# Altium PCB PCB1.PcbDoc (part 2 of 7)
Units mm, origin at the board's own origin, x right, y up, seen from the top; angles counter-clockwise.
Board outline 100 x 100 mm, 6 copper layers (Top, GND_1, Signal, PWR, GND_2, Bottom), stack 0.816 mm thick; 321 components, 260 nets, 1718 pads, 694 vias.
Unrouted connection lines stored in the file: 527.
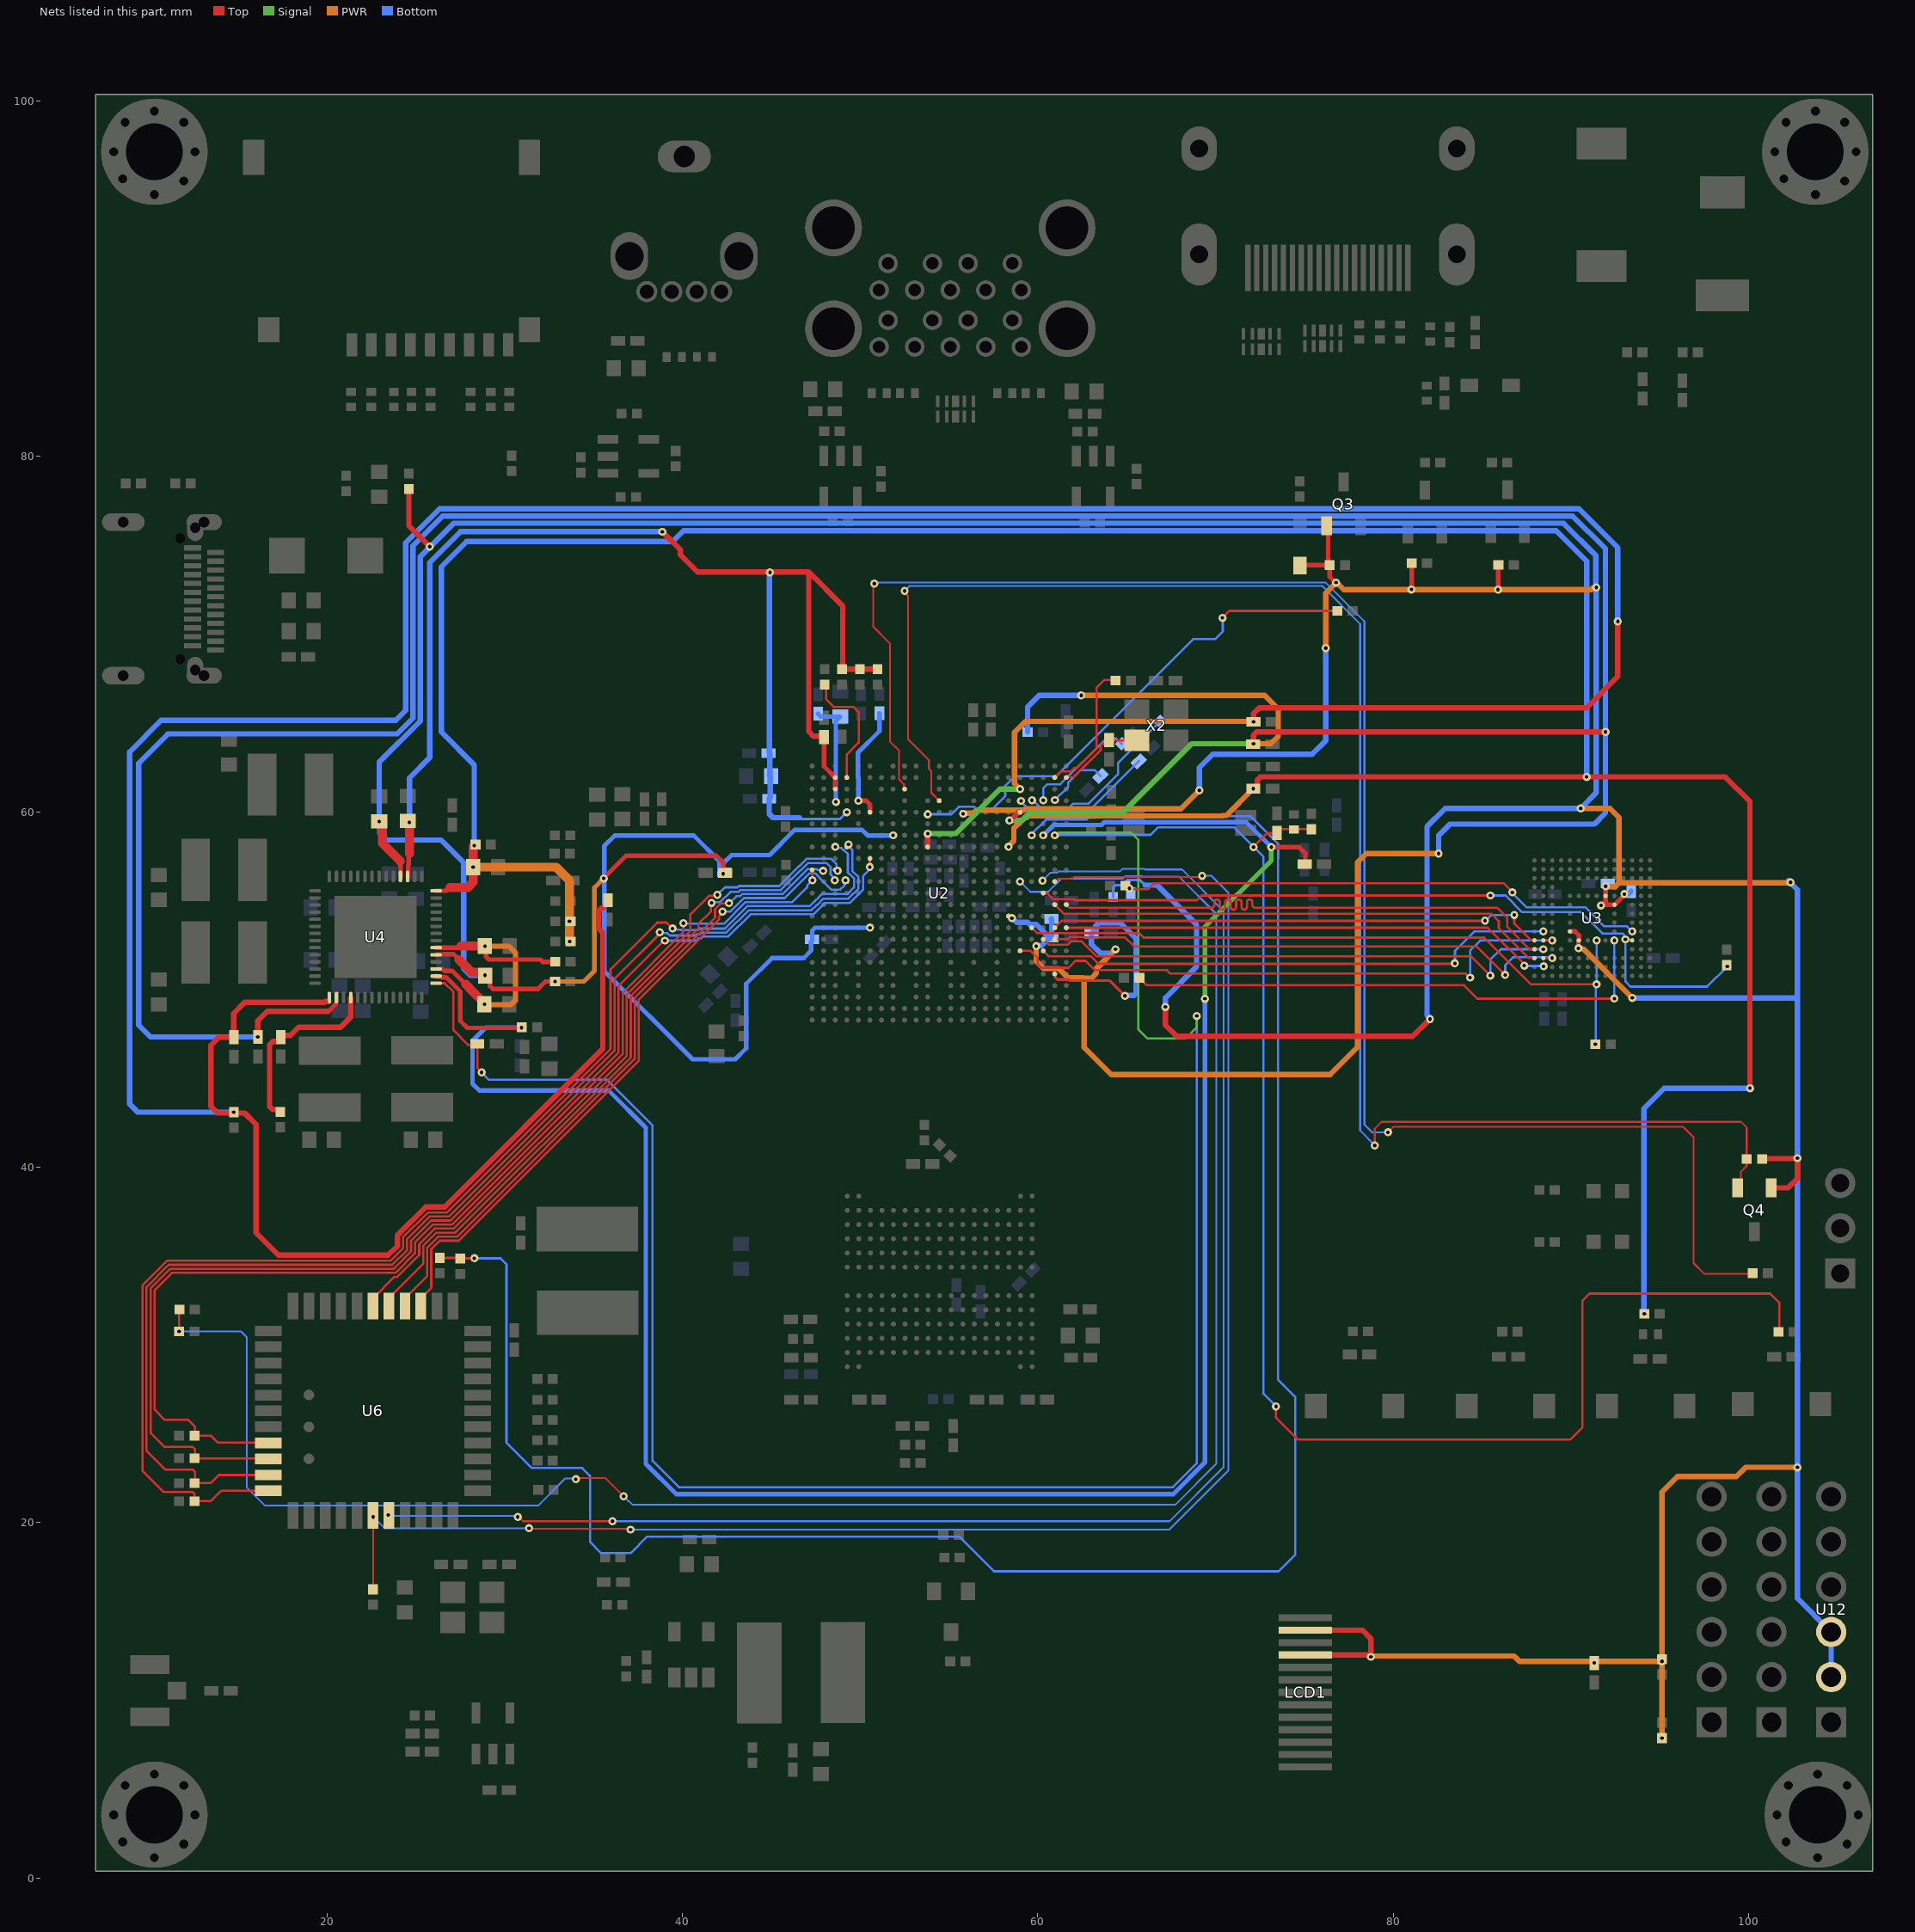
[diagram p6: the nets of this part, all layers, seen from the top]

## Footprints (in the part's own frame and the unit in brackets; to place one, negate y for a bottom-side part, rotate by r counter-clockwise, add the part's x,y. Pads: shape width x height; smd on the part's side, far side on the other; paste and mask are expansions set on the pad) (continued)
TF-SMD_TF-01A [mm]
  rect 0.6x1.3 smd: 1(2.24,5.276) 2(1.14,5.276) 3(0.04,5.276) 4(-1.06,5.276) 5(-2.16,5.276) 6(-3.26,5.276) 7(-4.36,5.276) 8(-5.46,5.276) 9(-6.56,5.276)
  rect 1.2x1.4 smd: 10(-7.76,4.426) 13(6.92,4.426)
  rect 1.2x2 smd: 11(-7.76,-5.276) 12(7.76,-5.276)
  Keep-Out Layer board cut-out: -4.45,-5.566 -4.45,-5.666 -4.526,-5.849 -4.667,-5.99 -4.85,-6.066 -5.049,-6.066 -5.233,-5.99 -5.374,-5.849 -5.45,-5.666 -5.45,-5.566 -5.45,-5.467 -5.374,-5.283 -5.233,-5.142 -5.049,-5.066 -4.85,-5.066 -4.667,-5.142 -4.526,-5.283 -4.45,-5.467 -4.45,-5.566 -4.45,-5.566
  Keep-Out Layer board cut-out: 3.55,-5.566 3.55,-5.666 3.474,-5.849 3.333,-5.99 3.149,-6.066 2.951,-6.066 2.767,-5.99 2.626,-5.849 2.55,-5.666 2.55,-5.566 2.55,-5.467 2.626,-5.283 2.767,-5.142 2.951,-5.066 3.149,-5.066 3.333,-5.142 3.474,-5.283 3.55,-5.467 3.55,-5.566 3.55,-5.566
  Keep-Out Layer circle w0.025: c-4.95,-5.566 r0.5
  Keep-Out Layer circle w0.025: c3.05,-5.566 r0.5
  Keep-Out Layer region: -4.45,-5.566 -4.45,-5.666 -4.526,-5.849 -4.667,-5.99 -4.85,-6.066 -5.049,-6.066 -5.233,-5.99 -5.374,-5.849 -5.45,-5.666 -5.45,-5.566 -5.45,-5.467 -5.374,-5.283 -5.233,-5.142 -5.049,-5.066 -4.85,-5.066 -4.667,-5.142 -4.526,-5.283 -4.45,-5.467 -4.45,-5.566 -4.45,-5.566
  Keep-Out Layer region: 3.55,-5.566 3.55,-5.666 3.474,-5.849 3.333,-5.99 3.149,-6.066 2.951,-6.066 2.767,-5.99 2.626,-5.849 2.55,-5.666 2.55,-5.566 2.55,-5.467 2.626,-5.283 2.767,-5.142 2.951,-5.066 3.149,-5.066 3.333,-5.142 3.474,-5.283 3.55,-5.467 3.55,-5.566 3.55,-5.566
  silkscreen extent -7.37,-9.58 7.37,3.41, body extent -8,-9.78 7.97,5.71, height 1.92
TSOT-23-5_L2.9-W1.6-P0.95-LS2.8-BR [mm]
  rect 1.1x0.7 smd: 1(1.294,-0.951) 2(1.294,-0.001) 3(1.294,0.951) 4(-1.294,0.951) 5(-1.294,-0.949)
  silkscreen extent -0.97,-1.65 1.52,1.61, body extent -1.2,-1.45 1.2,1.45, height 1
USB-A-TH_4P-P1.40-V-F-C39416 [mm]
  round 1.2 hole 0.8: 1(2.098,3.8) 2(0.698,3.8) 3(-0.699,3.8) 4(-2.098,3.8)
  oval 2.1x2.7 hole 1.6 slot 2.1 at 90 deg copper offset -0.001,0.001: 5(-3.08,1.8)
  oval 2.1x2.7 hole 1.6 slot 2.3 at 90 deg copper offset 0.001,0.001: 6(3.08,1.8)
  oval 3x1.8 hole 1.2 slot 2.4 at 0 deg: 7(-0.01,-3.8)
  silkscreen extent -3.5,-8.7 3.5,4.9, body extent -3.4,-8.78 3.6,5.02, height 14.69
USB-A-TH_XUNPU_USB-303WSD-BRY [mm]
  round 1.1 hole 0.7 paste-2539.97 mask+0.05: 1(-3.5,-1.35) 2(-1,-1.35) 3(1,-1.35) 4(3.5,-1.35) 5(4,0.15) 6(2,0.15) 7(0,0.15) 8(-2,0.15) 9(-4,0.15) 10(-3.5,1.85) 11(-1,1.85) 12(1,1.85) 13(3.5,1.85) 14(4,3.35) 15(2,3.35) 16(0,3.35) 17(-2,3.35) 18(-4,3.35)
  round 3.2 hole 2.4 paste-2539.97 mask+0.05: 19(6.57,-3.35) 20(6.57,2.33) 21(-6.57,2.33) 22(-6.57,-3.35)
  silkscreen extent -7.26,-12.97 7.19,4.7, body extent -7.9,-12.93 7.7,4.57, height 15.96
USB-C-SMD_MC-312D-C [mm]
  oval 0.9x2 hole 0.6 slot 1.6 at 90 deg paste-2539.97 mask+0.051: 1(-4.32,1.95) 2(4.32,1.95)
  oval 1.5x0.9 hole 0.6 slot 1.2 at 0 deg paste-2539.97 mask+0.051: 1(-4,1.45) 2(4,1.45)
  oval 1x2.4 hole 0.6 slot 1.9 at 90 deg paste-2539.97 mask+0.051: 3(4.32,-2.6) 4(-4.32,-2.6)
  rect 0.3x0.95 smd paste-100 mask+0.051: A1(-2.62,2.6) A2(-2.12,2.6) A3(-1.62,2.6) A4(-1.12,2.6) A5(-0.62,2.6) A6(-0.12,2.6) A7(0.38,2.6) A8(0.88,2.6) A9(1.38,2.6) A10(1.88,2.6) A11(2.38,2.6) A12(2.88,2.6) B1(2.63,1.3) B2(2.13,1.3) B3(1.63,1.3) B4(1.13,1.3) B5(0.63,1.3) B6(0.13,1.3) B7(-0.37,1.3) B8(-0.87,1.3) B9(-1.37,1.3) B10(-1.87,1.3) B11(-2.37,1.3) B12(-2.87,1.3)
  round 0.6 hole 0.6 unplated paste-2539.97: ""(-3.4,0.6) ""(3.4,0.6)
  silkscreen extent -4.57,-5.27 4.57,3.12, body extent -4.61,-6.86 4.63,3.69, height 3.73

## Part data
AUDIO1: "3.5mm Headphone Jack 30V 500mA SMD Audio Connectors ROHS", Current Rating=500mA, JLCPCB Part Class="Extended Part", LCSC Part Name=3.5mm耳机座, Manufacturer=韩国韩荣, Voltage Rating (Max)=30V, Add into BOM=yes, Connector Type="3.5mm Headphone Jack", Convert to PCB=yes, Datasheet=https://item.szlcsc.com/datasheet/PJ-327C-4A/157145.html, Device=PJ-327C-4A, Manufacturer Part=PJ-327C-4A, Supplier=LCSC, Supplier Footprint=SMD, Supplier Part=C145813, Symbol=PJ-327C-4A
C1 C22 C38 C53 C55 C56 C58 C61 C62 C63 C64 C65 C66 C67 C68 C69 C70 C71 C76 C77 C78 C79 C80 C82 C83 C85 C87 C91 C93 C107 C108 C114 C120 C132 C135: "10V 10uF X5R ±10% 0603 Ceramic Capacitors ROHS"
C2 C3 C4 C19 C23 C24: "50V 1uF X5R ±10% 0603 Ceramic Capacitors ROHS"
C5 C6 C7 C8 C9 C10 C11 C12 C17 C18 C20 C21 C25 C26: "50V 100nF X7R ±10% 0603 Ceramic Capacitors ROHS"
C13 C16 C29 C30 C43: library part 100nF, "50V 100nF X7R ±10% 0603 Ceramic Capacitors ROHS"
C14 C27: library part 10uF, "10V 10uF X5R ±10% 0603 Ceramic Capacitors ROHS"
C15 C28: library part 1uF, "50V 1uF X5R ±10% 0603 Ceramic Capacitors ROHS"
C31 C32 C35 C36 C44 C45 C46 C48 C49 C50 C51 C54 C75 C81 C84 C86 C90 C92 C95 C96 C97 C98 C99 C100 C106 C111 C112 C117 C118 C123 C124 C126 C130 C133 C134 C141 C142 C143 C144 C145 C147 C148 C149 C150 C151 C153 C154 C155 C156: "50V 100nF X7R ±10% 0402 Ceramic Capacitors ROHS"
C33 C34 C39 C40 C59 C72 C73 C74 C94 C104 C136 C137: "10V 4.7uF X5R ±20% 0402 Ceramic Capacitors ROHS"
C37: "50V 10pF C0G ±5% 0402 Ceramic Capacitors ROHS"
C41 C42: "50V 20pF NP0 ±5% 0402 Ceramic Capacitors ROHS"
C47: "16V 2.2uF X5R ±10% 0402 Ceramic Capacitors ROHS"
C52 C113 C119: "16V 22uF X5R ±20% 0603 Ceramic Capacitors ROHS"
C57 C102 C103 C131: "50V 1nF X7R ±10% 0402 Ceramic Capacitors ROHS"
C60 C89 C101 C105 C109 C110 C115 C116 C121 C122 C129 C138 C146 C152: "50V 1uF X5R ±10% 0402 Ceramic Capacitors ROHS"
C88: "50V 22pF C0G ±5% 0402 Ceramic Capacitors ROHS"
C125 C128: "50V 12pF C0G ±5% 0402 Ceramic Capacitors ROHS"
C127: "16V 220nF X7R ±10% 0402 Ceramic Capacitors ROHS"
C139 C140: "50V 7pF NP0 0402 Ceramic Capacitors ROHS"
C157: "25V 470nF X5R ±10% 0402 Ceramic Capacitors ROHS"
CN1: "HDMI-A SMD USB, DVI, HDMI Connector Assemblies ROHS", Current Rating (Max)=-, JLCPCB Part Class="Extended Part", Manufacturer=kinghelm(金航标), Add into BOM=yes, Connector Type=HDMI-A, Convert to PCB=yes, Datasheet=https://atta.szlcsc.com/upload/public/pdf/source/20211208/D47DE7411E98B8CA58BDDFA754B04DEC.pdf, Device=KH-HDMI-19P-Cu, Gender=Mother, LCSC Part Name=KH-HDMI-19P-Cu, Manufacturer Part=KH-HDMI-19P-Cu, Mounting Style="Horizontal attachment", Number of Pins=19P, Operating Temperature Range=-, Rated Voltage (Max)=-, Supplier=LCSC, Supplier Footprint=SMD, Supplier Part=C709361, Symbol=KH-HDMI-19P-CU
D1 D2 D6: "3.5A@8/20us 30W@8/20us 12V 6V 5V DFN2510-10 TVS Diodes ROHS", Clamping Voltage=12V, JLCPCB Part Class="Extended Part", Junction Capacitance=0.5pF, LCSC Part Name="ESD 5V截止 峰值脉冲电流：3.5A@8/20us", Manufacturer=AMAZING(晶焱), Peak Pulse Current (Ipp)=3.5A@8/20us, Peak Pulse Power Dissipation (Ppp)=30W@8/20us, Reverse Leakage Current (Ir)=1.5uA, Reverse Stand-Off Voltage (Vrwm)=5V, Voltage - Breakdown=6V, Add into BOM=yes, Convert to PCB=yes, Datasheet=https://item.szlcsc.com/datasheet/AZ1045-04F.R7G/331915.html, Device=AZ1045-04F.R7G, level of protection="IEC 61000-4-5；IEC 61000-4-2", Manufacturer Part=AZ1045-04F.R7G, Number of Channels=4, Supplier=LCSC, Supplier Footprint=DFN2510-10, Supplier Part=C356811, Symbol=AZ1045-04F.R7G, Type=ESD
D3 D4: library part 1N5819WS_C191023, "25A 40V 600mV@1A 1A SOD-323 Single Diodes ROHS", Current - Rectified=1A, JLCPCB Part Class="Basic Part", LCSC Part Name="电压:40V 电流:1A", Manufacturer=Hottech(合科泰), Non-Repetitive Peak Forward Surge Current=25A, Voltage - DC Reverse(Vr)=40V, Voltage - Forward(Vf@If)=600mV@1A, Add into BOM=yes, Convert to PCB=yes, Datasheet=https://item.szlcsc.com/datasheet/1N5819WS/213850.html, Device=1N5819WS_C191023, Manufacturer Part=1N5819WS, Supplier=LCSC, Supplier Footprint=SOD-323, Supplier Part=C191023, Symbol=1N5819WS
D5: library part SMAJ5.0A_C83329, "43.5A 400W 9.2V 6.4V Unidirectional 5V DO-214AC(SMA) TVS Diodes ROHS", Clamping Voltage=9.2V, JLCPCB Part Class="Extended Part", LCSC Part Name="耐压/V 5V-440V 峰值脉冲功率 400W", Manufacturer=Littelfuse(美国力特), Operating Temperature=-65℃~+150℃, Peak Pulse Current (Ipp)=43.5A, Peak Pulse Power Dissipation (Ppp)=400W, Reverse Leakage Current (Ir)=800uA, Reverse Stand-Off Voltage (Vrwm)=5V, Voltage - Breakdown=6.4V, Add into BOM=yes, Convert to PCB=yes, Datasheet=https://item.szlcsc.com/datasheet/SMAJ5.0A/84493.html, Device=SMAJ5.0A_C83329, Manufacturer Part=SMAJ5.0A, Polarity=Unidirectional, Supplier=LCSC, Supplier Footprint=DO-214AC(SMA), Supplier Part=C83329, Symbol=SMAJ5.0A-C83329, Type=TVS
H2: Color=Black, Current Rating=3A, JLCPCB Part Class="Extended Part", LCSC Part Name="1x3P 间距:2.54mm 方针 直插", Manufacturer=hanxia(韩下), Operating Temperature=-40℃~+105℃, Voltage Rating (Max)=1kV, Add into BOM=yes, Circluar Pins/Square Pins="Pin Header", Contact Material=Brass, Contact Plating=Gold, Convert to PCB=yes, Datasheet=https://item.szlcsc.com/datasheet/HX%2520PZ2.54-1x3P%2520ZZ/34444549.html, Device="HX PZ2.54-1x3P ZZ", Insulation Height=2.5mm, Length of End Connection Pin=3mm, Length of Mating Pin=6mm, Manufacturer Part="HX PZ2.54-1x3P ZZ", Mounting Type="Through Hole", Number of Pins=3P, Number of Rows=1, Pin Structure=1x3P, Pitch=2.54mm, Row Spacing=-, Supplementary Features=-, Supplier=LCSC, Supplier Footprint=插件,P=2.54mm, Supplier Part=C32713269, Symbol="HX PZ2.54-1X3P ZZ"
JP1: library part U.FL-R-SMT-1(80)_C88374, JLCPCB Part Class="Extended Part", LCSC Part Name="IPEX 内针", Manufacturer=HRS(广濑), Manufacturer Part=U.FL-R-SMT-1(80), Operating Temperature Range=-40℃~+90℃, Add into BOM=yes, Connector Type="Board Side", Convert to PCB=yes, Datasheet=https://item.szlcsc.com/datasheet/U.FL-R-SMT-1(80)/89553.html, Device=U.FL-R-SMT-1(80)_C88374, Impedance=50Ω, Interface="Male Pin", Interface Diameter=2mm, Interface Length/Height=1.25mm, Number of Ports=1, RF Series=IPEX, Style=-, Supplier=LCSC, Supplier Footprint=SMD, Supplier Part=C88374, Symbol=U.FL-R-SMT-1(80)
L1 L7: library part FNR6020S4R7MT, "2.5A 4.7uH Magnetic Shielded Inductor ±20% 3.6A 75mΩ SMD,6x6mm Fixed Inductors ROHS", DC Resistance (DCR)=75mΩ, JLCPCB Part Class="Extended Part", LCSC Part Name="4.7uH ±20% 3.6A", Manufacturer=cjiang(长江微电), Saturation Current (Isat)=3.6A, Tolerance=±20%, Add into BOM=yes, Convert to PCB=yes, Datasheet=https://atta.szlcsc.com/upload/public/pdf/source/20190327/C167925_9EFF0AABC4CA629C2CC95961DBF7D39D.pdf, Device=FNR6020S4R7MT, Manufacturer Part=FNR6020S4R7MT, Supplier=LCSC, Supplier Footprint=SMD,6x6mm, Supplier Part=C168008, Symbol=FNR6020S4R7MT
L2 L3 L4 L5 L6: library part SLW4030S1R5NST, "4.15A 1.5uH ±30% 18mΩ SMD,4x4mm Fixed Inductors ROHS", Current Rating=4.15A, DC Resistance(DCR)=18mΩ, JLCPCB Part Class="Extended Part", LCSC Part Name="1uH ±30%", Manufacturer=Sunltech(顺磁), Manufacturer Part=SLW4030S1R0NST, Tolerance=±30%, Add into BOM=yes, Convert to PCB=yes, Datasheet=https://item.szlcsc.com/datasheet/SLW4030S1R0NST/207399.html, Device=SLW4030S1R0NST, Supplier=LCSC, Supplier Footprint=SMD,4x4mm, Supplier Part=C206354, Symbol=SLW4030S1R0NST
LCD1: "1.14inch ST7789 135x240 2 LCD, OLED, Graphic ROHS", JLCPCB Part Class="Extended Part", LCSC Part Name="0.99寸 彩色 40x160像素分辨率 焊接10PIN", Manufacturer=Wisevision(新智景), Add into BOM=yes, Convert to PCB=yes, Datasheet=https://item.szlcsc.com/datasheet/N099-0416THBIG01-H10/5717767.html, Device=N099-0416THBIG01-H10, Dot Pixels=160x40, Manufacturer Part=N099-0416THBIG01-H10, Size=0.99, Supplier=LCSC, Supplier Footprint=-, Supplier Part=C5123574, Symbol=N099-0416THBIG01-H10
PWR: "25mA 1.8V~2.4V Red 0603 LED Indication - Discrete ROHS"
Q1 Q2 Q3 Q4: library part BSN20_C116157, "50V 100mA 10Ω@2.75V,0.2A 1.5V@250uA 1 N-Channel SOT-23 Single FETs, MOSFETs ROHS", Current - Continuous Drain(Id)=100mA, Drain to Source Voltage=50V, Gate Threshold Voltage (Vgs(th))=1.5V@250uA, Input Capacitance(Ciss)=40pF, JLCPCB Part Class="Extended Part", LCSC Part Name="1个N沟道 耐压:50V 电流:0.1A", Manufacturer=SHIKUES(时科), Output Capacitance(Coss)=15pF, Pd - Power Dissipation=-, Reverse Transfer Capacitance (Crss@Vds)=10pF, Add into BOM=yes, Convert to PCB=yes, Datasheet=https://item.szlcsc.com/datasheet/BSN20/117410.html, Device=BSN20_C116157, Manufacturer Part=BSN20, Number=1个N沟道, RDS(on)=10Ω@2.75V,0.2A, Supplier=LCSC, Supplier Footprint=SOT-23, Supplier Part=C116157, Symbol=BSN20, Type=N沟道
R1 R2: "240Ω 62.5mW 50V ±100ppm/℃ Thick Film Resistor ±1% 0402 Chip Resistor - Surface Mount ROHS"
R3 R6 R7 R43 R44 R45 R77 R78 R82 R83 R90 R91: "100mW 2kΩ 75V ±100ppm/℃ Thick Film Resistor ±1% 0402 Chip Resistor - Surface Mount ROHS"
R4: "62.5mW 1.5kΩ 50V ±100ppm/℃ Thick Film Resistor ±1% 0402 Chip Resistor - Surface Mount ROHS"
R5: "100Ω 62.5mW 50V ±100ppm/℃ Thick Film Resistor ±1% 0402 Chip Resistor - Surface Mount ROHS"
R8 R9 R12 R23 R29 R39 R42 R46 R49 R53 R68 R69 R80 R84: "0Ω 62.5mW 50V Thick Film Resistor ±1% 0402 Chip Resistor - Surface Mount ROHS"
R10 R13 R15 R18 R19 R20 R21 R24 R25 R26 R27 R28 R30 R37 R38 R52 R59 R62 R71 R73 R75 R79 R85 R94: "62.5mW 10kΩ 50V ±100ppm/℃ Thick Film Resistor ±1% 0402 Chip Resistor - Surface Mount ROHS"
R11 R14: "62.5mW 1.8kΩ 50V ±100ppm/℃ Thick Film Resistor ±1% 0402 Chip Resistor - Surface Mount ROHS"
R16 R17: "56kΩ 62.5mW 50V ±100ppm/℃ Thick Film Resistor ±1% 0402 Chip Resistor - Surface Mount ROHS"
R22 R57: "100kΩ 62.5mW 50V ±100ppm/℃ Thick Film Resistor ±1% 0402 Chip Resistor - Surface Mount ROHS"
R31 R32: library part 100kΩ, "100kΩ 62.5mW 50V ±100ppm/℃ Thick Film Resistor ±1% 0402 Chip Resistor - Surface Mount ROHS"
R33 R34 R35 R36: "62.5mW 33Ω 50V ±100ppm/℃ Thick Film Resistor ±1% 0402 Chip Resistor - Surface Mount ROHS"
R40 R41: "5.1kΩ 62.5mW 50V ±100ppm/℃ Thick Film Resistor ±1% 0402 Chip Resistor - Surface Mount ROHS"
R47 R48 R50 R51 R58 R61 R64: library part 0Ω, "0Ω 62.5mW 50V Thick Film Resistor ±1% 0402 Chip Resistor - Surface Mount ROHS"
R54: library part 10kΩ, "62.5mW 10kΩ 50V ±100ppm/℃ Thick Film Resistor ±1% 0402 Chip Resistor - Surface Mount ROHS"
R55 R60 R63: "62.5mW 6.8kΩ 50V ±100ppm/℃ Thick Film Resistor ±1% 0402 Chip Resistor - Surface Mount ROHS"
R56: "62.5mW 47kΩ 50V ±100ppm/℃ Thick Film Resistor ±1% 0402 Chip Resistor - Surface Mount ROHS"
R65: "62.5mW 33kΩ 50V ±100ppm/℃ Thick Film Resistor ±1% 0402 Chip Resistor - Surface Mount ROHS"
R66 R70 R74 R86 R87 R88 R89 R93: "1kΩ 62.5mW 50V ±100ppm/℃ Thick Film Resistor ±1% 0402 Chip Resistor - Surface Mount ROHS"
R67 R72: "62.5mW 150kΩ 50V ±100ppm/℃ Thick Film Resistor ±1% 0402 Chip Resistor - Surface Mount ROHS"
R76: "6.04kΩ 62.5mW 50V ±100ppm/℃ Thick Film Resistor ±1% 0402 Chip Resistor - Surface Mount ROHS"
R81: "62.5mW 10MΩ 50V ±100ppm/℃ Thick Film Resistor ±1% 0402 Chip Resistor - Surface Mount ROHS"
R92: "10Ω 62.5mW 50V ±200ppm/℃ Thick Film Resistor ±1% 0402 Chip Resistor - Surface Mount ROHS"
STATUS: "Green 0603 LED Indication - Discrete ROHS"
SW1 SW2 SW3 SW4: "Without Bracket 4mm 12V 3mm Round Button SPST 50mA SMD,4x3mm Tactile Switches ROHS"
U1: JLCPCB Part Class=扩展库, LCSC Part Name=K4E6E304EC-EGCG, Manufacturer=SAMSUNG(三星半导体), Add into BOM=yes, Convert to PCB=yes, Datasheet=https://atta.szlcsc.comnull, Device=LPDDR3-2G, Manufacturer Part=K4E6E304EC-EGCG, Supplier=LCSC, Supplier Footprint=SMD, Supplier Part=C2803256, Symbol=K4E6E304EC-EGCG
U3: library part KLM8G1GETF-B041_1, "8GB 2.7V~3.6V eMMC 5.1 330/50 MB/s FBGA-153(11.5x13) Memory (ICs) ROHS", Controller Operating Voltage (VCCQ)=2.7V~3.6V；1.7V~1.95V, JLCPCB Part Class="Extended Part", Manufacturer=SAMSUNG(三星半导体), NAND Operating Voltage (VCCF)=2.7V~3.6V, Operating Temperature=-25℃~+85℃, Add into BOM=yes, configuration=-, Convert to PCB=yes, Datasheet=https://item.szlcsc.com/datasheet/KLM8G1GETF-B041/512098.html, Device=KLM8G1GETF-B041, Interface="eMMC 5.1", LCSC Part Name=KLM8G1GETF-B041, Manufacturer Part=KLM8G1GETF-B041, Memory Size=8GB, Random Read/Write (IOPS)=-, Reading Speed in Sequence=330MB/S, Sequential Read/Write (MB/s)="330/50 MB/s", Supplier=LCSC, Supplier Footprint=FBGA-153(11.5x13), Supplier Part=C499918, Symbol=KLM8G1GETF-B041, Voltage - Supply=2.7V~3.6V, Writing Speed in Sequence=50MB/S
U5: "Push-Push 1.85mm Connector and Ejector MicroSD Card (TF Card) SMD PC Card Sockets ROHS"
U6: library part AP6212, "2.4GHz -90dBm QFN-44(12x12) RF Transceiver Modules and Modems ROHS", JLCPCB Part Class="Extended Part", Manufacturer=AMPAK(正基科技), Operating Temperature=-30℃~+85℃, Output Power=16dBm, Receive  Current=-, Add into BOM=yes, Antenna Type=-, Convert to PCB=yes, Datasheet=https://item.szlcsc.com/datasheet/AP6212/2941698.html, Device=AP6212, Interface Type="On-board PCB antenna", LCSC Part Name=AP6212, Manufacturer Part=AP6212, Send  Current=-, Sensitivity=-90dBm, Supplier=LCSC, Supplier Footprint=QFN-44(12x12), Supplier Part=C2798300, Symbol=AP6212, Utilized IC / Part=-, Voltage - Supply=-, Wireless Standard=-
U7 U8 U9 U10 U11 U14 U15 U16 U17 U18 U19 U20 U21 U22 U23 U24 U25 U27 U28 U32 U35: library part ESD5451N_C5261080, "9A 9.8V 8V Bidirectional 5V DFN1006-2L TVS Diodes ROHS", Clamping Voltage=9.8V, JLCPCB Part Class="Extended Part", Junction Capacitance=15pF, LCSC Part Name="5V 15pF 双向", Manufacturer="HXY MOSFET(华轩阳电子)", Peak Pulse Current (Ipp)=9A, Reverse Leakage Current (Ir)=500nA, Reverse Stand-Off Voltage (Vrwm)=5V, Voltage - Breakdown=8V, Add into BOM=yes, Convert to PCB=yes, Datasheet=https://item.szlcsc.com/datasheet/ESD5451N/5983779.html, Device=ESD5451N_C5261080, level of protection="IEC 61000-4-2", Manufacturer Part=ESD5451N, Number of Channels=1.0, Polarity=Bidirectional, Supplier=LCSC, Supplier Footprint=DFN1006-2L, Supplier Part=C5261080, Symbol=ESD5451N_C5261080, Type=ESD
U12 U33 U34: "6P 1x6P Gold Brass -40℃~+105℃ Black Pin Header 2.54mm 2.5mm 6mm 1kV 3mm 3A 1 Through Hole Through Hole,P=2.54mm Headers, Male Pins ROHS", Color=Black, Current Rating=3A, JLCPCB Part Class="Extended Part", LCSC Part Name="1x6P 间距:2.54mm 方针 直插", Manufacturer=hanxia(韩下), Operating Temperature=-40℃~+105℃, Voltage Rating (Max)=1kV, Add into BOM=yes, Circluar Pins/Square Pins="Pin Header", Contact Material=Brass, Contact Plating=Gold, Convert to PCB=yes, Datasheet=https://item.szlcsc.com/datasheet/HX%2520PZ2.54-1x6P%2520ZZ/34444552.html, Device="HX PZ2.54-1x6P ZZ", Insulation Height=2.5mm, Length of End Connection Pin=3mm, Length of Mating Pin=6mm, Manufacturer Part="HX PZ2.54-1x6P ZZ", Mounting Type="Through Hole", Number of Pins=6P, Number of Rows=1, Pin Structure=1x6P, Pitch=2.54mm, Row Spacing=-, Supplementary Features=-, Supplier=LCSC, Supplier Footprint=插件,P=2.54mm, Supplier Part=C32713272, Symbol="HX PZ2.54-1X6P ZZ"
U13 U26 U29: library part SY6280AAC_C55136, "1 Active High High Side Switch SOT-23-5 Power Distribution Switches, Load Drivers ROHS", JLCPCB Part Class="Extended Part", Manufacturer=Silergy(矽力杰), Operating Temperature	-=-40℃~+125℃, Voltage - Supply=2.4V~5.5V, Add into BOM=yes, Control Input Logic="Active High", Convert to PCB=yes, Datasheet=https://item.szlcsc.com/datasheet/SY6280AAC/56162.html, Device=SY6280AAC_C55136, Features="Over Temperature Protection；Overcurrent Protection(OCP)", LCSC Part Name=SY6280AAC, Manufacturer Part=SY6280AAC, Number of Channels=1, RDS(on)=80mΩ, Supplier=LCSC, Supplier Footprint=SOT-23-5, Supplier Part=C55136, Symbol=SY6280AAC, Type="High Side Switch"
U30: "1.5MHz Buck 2A Adjustable 1 SOT-23-5 Voltage Regulators - DC DC Switching Regulators ROHS", Frequency - Switching=1.5MHz, JLCPCB Part Class="Extended Part", LCSC Part Name="高效1.5MHz 2A同步降压调节器", Manufacturer=Silergy(矽力杰), Operating Temperature=-40℃~+125℃@(TA/TJ), Output Current=2A, Output Voltage=-, Quiescent Current=50uA, Voltage - Supply=2.5V~5.5V, Add into BOM=yes, Convert to PCB=yes, Datasheet=https://item.szlcsc.com/datasheet/SY8089A1AAC/486366.html, Device=SY8089A1AAC, Function=Buck, Manufacturer Part=SY8089A1AAC, Number of Outputs=1, Output Type=Adjustable, Supplier=LCSC, Supplier Footprint=SOT-23-5, Supplier Part=C479074, Switch tube (built-in/external)=Built-In, Symbol=SY8089A1AAC, Synchronous Rectifier=Yes, Topology=Buck
U31: "65dB@(1kHz) Positive Fixed 1.8V SOT-23-5 Voltage Regulators - Linear, Low Drop Out (LDO) Regulators ROHS", JLCPCB Part Class="Extended Part", LCSC Part Name="输入6V 输出1.8V 250mA", Manufacturer=MICRONE(南京微盟), Operating Temperature=-40℃~+150℃@(Ta), Output Current=350mA, Output Voltage=1.8V, Power Supply Rejection Ratio (PSRR)=65dB@(1kHz), standby current=50uA, Voltage - Supply=6V, Voltage Dropout=200mV@(100mA), Add into BOM=yes, Convert to PCB=yes, Datasheet=https://item.szlcsc.com/datasheet/ME6212C18M5G/236109.html, Device=ME6212C18M5G, Features=Enable, Manufacturer Part=ME6212C18M5G, Noise=50uVrms, Number of Outputs=1, Output Configuration=Positive, Output Type=Fixed, Supplier=LCSC, Supplier Footprint=SOT-23-5, Supplier Part=C236669, Symbol=ME6212C18M5G
USB1: "USB 3.0 2 9Px2 -30℃~+85℃ Type-A Through Hole,Right Angle USB, DVI, HDMI Connector Assemblies ROHS", Current Rating-Power=1.8A, Detection color=Blue, JLCPCB Part Class="Extended Part", LCSC Part Name="Type-A 母 弯插", Manufacturer=XUNPU(讯普), Operating Temperature=-30℃~+85℃, Voltage Rating=30V, Add into BOM=yes, Connector Type=Type-A, Convert to PCB=yes, Datasheet=https://item.szlcsc.com/datasheet/USB-303WSD-BRY/3132965.html, Device=USB-303WSD-BRY, Gender=Female, Length=-, Manufacturer Part=USB-303WSD-BRY, Mounting Type="Right Angle", Number of Contacts=9Px2, Number of Ports=2, Protocol Standard="USB 3.0", Supplier=LCSC, Supplier Footprint=插件, Supplier Part=C2895028, Symbol=USB-303WSD-BRY
USB2: "USB 2.0 1 4P Type-A Through Hole USB, DVI, HDMI Connector Assemblies ROHS", Current Rating-Power=2A, JLCPCB Part Class="Extended Part", LCSC Part Name="Type-A 母 侧插", Manufacturer=精拓金, Operating Temperature=-, Add into BOM=yes, Connector Type=Type-A, Convert to PCB=yes, Datasheet=https://item.szlcsc.com/datasheet/906-162A1011D10200/40400.html, Device=906-162A1011D10200, Gender=Female, Manufacturer Part=906-162A1011D10200, Mounting Type="Vertical, Flag", Number of Contacts=4P, Number of Ports=1, Protocol Standard="USB 2.0", Supplier=LCSC, Supplier Footprint=插件, Supplier Part=C39417, Symbol="AFSide of the three straight feet boundless copper14.0PBTWhite plastic90degree"
USBC1: "1 24P Type-C SMD USB, DVI, HDMI Connector Assemblies ROHS", JLCPCB Part Class="Extended Part", Manufacturer=SOFNG(硕方), Manufacturer Part=MC-312D-C, Contributor=LCSC, spicePre=U, spiceSymbolName=MC-312D, Supplier=LCSC, Supplier Part=C183607
X1: library part TAXM26M4RLBCCT2T, "Crystal Oscillator 20pF SMD3225-4P Crystals ROHS", Equivalent Series Resistance(ESR)=80Ω, Frequency Stability=±50ppm, JLCPCB Part Class="Extended Part", LCSC Part Name="26MHz ±10ppm 20pF", Load Capacitance=20pF, Manufacturer=YJX(雅晶鑫), Normal temperature Frequency Tolerance=±10ppm, Operating Temperature=-40℃~+85℃, Add into BOM=yes, Convert to PCB=yes, Datasheet=https://item.szlcsc.com/datasheet/TAXM26M4RLBCCT2T/175432.html, Device=TAXM26M4RLBCCT2T, Manufacturer Part=TAXM26M4RLBCCT2T, Supplier=LCSC, Supplier Footprint=SMD3225-4P, Supplier Part=C164050, Symbol=SMD-3225_4P26MHZ20PF10PPM-40~+85℃, Type="Crystal Oscillator"
X2: library part X322524MOB4SI, "Crystal Oscillator 12pF SMD3225-4P Crystals ROHS", Frequency Stability=±20ppm, JLCPCB Part Class="Extended Part", LCSC Part Name="YSX321SL 24MHZ 4P 3225 12PF ±10PPM -40~85℃ (±20PPM)", Load Capacitance=12pF, Manufacturer=YXC(扬兴晶振), Normal temperature Frequency Tolerance=±10ppm, Operating Temperature=-40℃~+85℃, Add into BOM=yes, Convert to PCB=yes, Datasheet=https://item.szlcsc.com/datasheet/X322524MOB4SI/71688.html, Device=X322524MOB4SI, Manufacturer Part=X322524MOB4SI, Supplier=LCSC, Supplier Footprint=SMD3225-4P, Supplier Part=C70590, Symbol=X322524MOB4SI, Type="Surface Mount Crystal"
X3: library part Q13MC14610001, "Crystal Oscillator 7pF MC-146 Crystals ROHS", Equivalent Series Resistance(ESR)=65kΩ, JLCPCB Part Class="Extended Part", LCSC Part Name="32.768kHz ±20ppm 7pF", Manufacturer=EPSON(爱普生), Normal temperature Frequency Tolerance=±20ppm, Operating Temperature=-40℃~+85℃, Add into BOM=yes, Convert to PCB=yes, Datasheet=https://atta.szlcsc.com/upload/public/pdf/source/20170211/1486785670215.pdf, Device=Q13MC14610001, Manufacturer Part=Q13MC14610001, Supplier=LCSC, Supplier Footprint=MC-146, Supplier Part=C94977, Symbol=MC-14632.768kHz7.0pF20PPM, Type="Surface Mount Crystal"
U2: Add into BOM=yes, Convert to PCB=yes, Device=Allwinner_H6, Symbol=Allwinner_H6
U4: Add into BOM=yes, Convert to PCB=yes, Device=AXP805, Symbol=AXP805

## Free pads (board coordinates)
  round 0.5 hole 0.5 mask+0.05: ""(8.001,3.556) ""(8.001,97.155) ""(8.509,2.032) ""(8.509,95.631) ""(8.636,5.207) ""(8.636,98.806) ""(10.287,1.143) ""(10.287,5.842) ""(10.287,94.742) ""(10.287,99.441) ""(11.938,1.905) ""(11.938,5.207) ""(11.938,95.504) ""(11.938,98.806) ""(12.573,3.556) ""(12.573,97.155) ""(101.473,97.155) ""(101.6,3.556) ""(101.981,95.631) ""(102.108,2.032) ""(102.108,98.806) ""(102.235,5.207) ""(103.759,94.742) ""(103.759,99.441) ""(103.886,1.143) ""(103.886,5.842) ""(105.41,95.504) ""(105.41,98.806) ""(105.537,1.905) ""(105.537,5.207) ""(106.045,97.155) ""(106.172,3.556)
  round 6 hole 3.2 mask+0.05: ""(10.287,3.556) ""(10.287,97.155) ""(103.759,97.155) ""(103.886,3.556)

## Via types
v1: diameter 0.457, hole 0.203, Top to Bottom, tented both sides, 685 vias
v2: diameter 0.61, hole 0.305, Top to Bottom, tented both sides, 9 vias

## Nets (pads, with @x,y where several pads share a name; then routed paths per layer and width w, separated by ;. In a path a pad name is that pad's centre, name@x,y a point inside that pad or via, vN(x,y) a via of type N, cw(c..) or ccw(c..) an arc to the next point about the centre after c; other vN are vias at no path point)
AC_AVCC: C134.2 C135.2 U2.D3 | length 6.2
  Bottom w0.254: C134.2@47.634,65.532 47.634,65.509 47.777,65.366 C135.2@48.876,65.366 ; v1(48.636,60.565) 48.636,65.125 C135.2@48.876,65.366 ; C135.2@48.879,65.366 C135.2@48.876,65.366
AC_VDD_IN: C136.2 U2.D5 U2.E6 | length 6.6
  Top w0.254: v1(49.903,60.632) 50.347,60.632 50.553,60.426 U2.E6@50.553,59.982
  Bottom w0.254: v1(49.903,60.632) 49.903,61.907 49.884,61.926 49.884,63.346 51.087,64.549 C136.2@51.087,65.557
ALDO1: C65.2 C99.2 R44.2 R45.2 R47.2 R89.2 U2.H18 U4.28 | length 187
  Top w0.254: U4.28@26.141,55.559 26.73,55.559 26.924,55.753
  Top w0.305: v1(72.124,61.31) 72.227,61.31 72.345,61.428 72.345,61.792 72.524,61.97 v1(90.886,61.97) 98.685,61.97 100.076,60.579 v1(100.076,44.45)
  Top w0.508: 26.924,55.753 27.932,55.753 28.229,56.051 v1(28.229,56.892) 28.229,58.045 v1(28.288,58.104) 28.346,58.162 R47.2@28.359,58.162
  PWR w0.305: v1(58.353,58.032) 58.353,58.073 58.652,58.373 58.652,59.082 59.262,59.692 59.384,59.692 59.464,59.772 70.378,59.772 70.403,59.797 70.611,59.797 v1(72.124,61.31)
  PWR w0.508: v1(28.229,56.892) 32.897,56.892 33.655,56.134 33.655,53.857 v1(33.647,53.848) 33.655,53.84 v1(33.655,52.705)
  Bottom w0.305: v1(28.288,58.104) 28.288,62.644 26.429,64.503 26.429,73.8 27.854,75.225 39.455,75.225 40.054,75.824 89.169,75.824 90.886,74.108 v1(90.886,61.97) ; v1@94.107,31.75 94.107,43.307 95.25,44.45 v1(100.076,44.45)
  other v1: 94.13,31.75
ALDO2: C66.2 C132.2 C133.2 C141.2 C145.2 R77.2 R78.2 R79.1 U2.B3 U2.C3 U2.E4 U4.31 | length 81.2
  Top w0.254: U4.31@24.533,56.367 24.56,56.394 24.56,56.984 24.593,57.018 24.593,57.613 24.638,57.658 ; C145.2@47.967,64.211 47.967,62.568 U2.B3@48.603,61.932 U2.C3@48.603,61.282
  Top w0.305: v1(38.871,75.765) 39.881,74.755 39.881,74.476 40.861,73.495 44.914,73.495 v1(44.929,73.48) ; v1@44.958,73.495 47.112,73.495 ; C145.2@47.967,64.211 47.916,64.262 47.371,64.262 47.112,64.521 47.112,73.501 49.022,71.591 49.022,68.067 R78.2@48.986,68.031 R79.1@49.992,68.031 R77.2@50.981,68.031
  Top w0.508: C66.2@24.552,59.492 v1(24.638,59.407) 24.638,57.658
  Bottom w0.152: 46.595,59.676 46.67,59.601 48.872,59.601 v1(49.253,59.982)
  Bottom w0.305: v1(24.638,59.407) 24.638,61.918 25.781,63.061 25.781,74.041 27.516,75.776 38.861,75.776 v1(38.871,75.765) ; v1(44.929,73.48) 44.9,73.451 44.9,63.337 44.929,63.308 44.922,63.3 44.922,62.019 44.939,62.001 44.939,60.799 C133.2@44.885,60.745 44.885,59.89 45.099,59.676 46.595,59.676
ALDO3: C48.2 C49.2 C67.2 C75.2 C78.2 C129.2 C130.2 C151.2 D3.2 LCD1.10 LCD1.12 Q3.1 Q4.1 R10.2 R13.2 R16.2 R48.2 R53.2 R70.1 R82.2 R83.2 R85.2 U2.E14 U2.G8 U2.R6 U3.E6 U3.F5 U3.J10 U3.K9 U4.19 U4.32 U12.2 U12.3 | length 427.6
  Top w0.152: U2.E14@55.753,59.982 55.753,59.947 55.802,59.898 v1(55.802,59.893)
  Top w0.254: 24.112,57.223 24.133,57.202 U4.32@24.133,56.367 ; U4.19@26.141,51.959 26.168,51.986 26.576,51.986 26.582,51.992 27.129,51.992 27.432,51.689 ; v1(28.894,50.806) 29.167,50.533 29.167,50.208 29.337,50.038 31.877,50.038 32.289,50.45 v1(32.834,50.45) ; v1(35.574,56.261) 35.574,56.275 36.83,57.531 41.91,57.531 42.291,57.15 v1(42.291,56.515) ; D3.2@74.743,73.857 74.774,73.889 R16.2@76.422,73.889 ; Q3.1@76.256,76.102 76.339,76.019 76.339,73.971 R16.2@76.422,73.889 ; v1(76.788,72.905) 76.755,72.905 76.422,73.238 R16.2@76.422,73.889 ; v1(81.026,72.517) 81.039,72.53 R10.2@81.039,74.006 ; v1(85.901,72.513) 85.91,72.523 85.91,73.887 R13.2@85.92,73.896 ; U3.E6@89.95,53.271 90.239,53.271 90.45,53.06 U3.F5@90.45,52.771 90.424,52.745 v1(90.424,52.324) ; v1(91.694,54.737) v1@91.734,54.777 ; v1(91.955,55.817) 91.955,55.276 U3.J10@91.95,55.271 91.95,54.993 v1@91.734,54.777 ; U3.K9@92.444,54.777 v1@91.877,54.777 ; U3.K9@92.45,54.771 93.007,55.328 v1(93.007,55.37) ; v1@91.734,54.777 91.735,54.776 v1@91.876,54.776 ; v1@91.876,54.776 v1@91.877,54.777
  Top w0.305: R53.2@24.604,78.173 24.604,76.107 v1(25.781,74.93) ; v1(67.183,49.022) 67.183,48.006 67.818,47.371 81.098,47.371 v1(82.071,48.344) ; LCD1.10@75.057,12.548 78.597,12.548 78.699,12.446 v1(78.74,12.446) 78.74,13.462 78.254,13.948 LCD1.12@75.057,13.948 ; R85.2@100.758,40.47 100.78,40.492 102.722,40.492 v1(102.743,40.513) 102.743,39.37 102.215,38.842 Q4.1@101.276,38.842
  Top w0.508: v1(22.938,59.464) 22.968,59.464 23.114,59.318 23.114,58.242 24.112,57.244 24.112,57.223 ; 27.432,51.689 28.156,50.965 28.748,50.965 28.894,50.819 v1(28.894,50.806)
  PWR w0.254: v1(32.834,50.45) 34.448,50.45 35.052,51.054 35.052,55.741 35.572,56.261 v1(35.574,56.261)
  PWR w0.305: v1(55.802,59.893) 55.831,59.922 56.364,59.922 56.545,60.103 59.222,60.103 59.296,60.177 68.051,60.177 v1(69.088,61.214) ; v1@76.2,69.088 v1(76.2,69.215) 76.2,72.317 v1(76.788,72.905) 76.829,72.905 77.217,72.517 v1(81.026,72.517) 81.028,72.515 v1(85.901,72.513) v1(85.901,72.513) 91.154,72.513 91.243,72.603 91.4,72.603 v1(91.43,72.632) ; v1@78.743,12.493 86.803,12.493 87.105,12.192 v1(95.123,12.192) ; v1(90.424,52.324) 90.453,52.295 90.688,52.295 v1(93.453,49.53) ; v1(90.551,60.198) 92.202,60.198 92.71,59.69 92.71,56.007 ; v1(91.955,55.817) 91.984,55.788 92.421,55.788 92.456,55.753 92.71,56.007 ; v1(95.123,7.874) v1(95.123,12.192) ; v1@102.221,56.007 92.71,56.007 ; v1@102.222,56.008 102.33,56.008 v1(102.359,56.037) ; v1(102.743,23.114) 99.838,23.114 99.316,22.591 95.997,22.591 95.123,21.717 v1(95.123,12.192)
  Bottom w0.152: R70.1@64.234,55.208 64.234,55.736 64.378,55.88 64.741,55.88 65.021,56.161 65.754,56.161 66.035,55.88
  Bottom w0.254: v1(42.291,56.515) 42.076,56.73 42.076,57.238 40.64,58.674 36.195,58.674 35.6,58.079 35.6,56.261 35.6,51.051 40.578,46.073 42.965,46.073 43.588,46.696 43.588,50.321 45.044,51.778 46.828,51.778 47.244,52.194 47.244,52.689 47.297,52.742 47.297,53.318 47.461,53.482 v1(50.553,53.482) ; C151.2@42.297,56.6 42.297,57.102 42.764,57.57 44.9,57.57 46.312,58.982 50.111,58.982 50.418,58.675 51.846,58.675 v1(51.853,58.682) ; v1(93.007,55.37) 93.244,55.37 93.387,55.513 C49.2@93.387,55.554
  Bottom w0.305: v1(28.894,50.806) 28.061,50.806 27.686,51.181 27.686,57.15 26.416,58.42 23.368,58.42 22.967,58.821 22.967,59.434 v1(22.938,59.464) 22.938,62.806 25.242,65.11 25.242,74.363 27.125,76.246 89.593,76.246 91.405,74.435 91.405,72.657 v1(91.43,72.632) 91.43,61.077 v1(90.551,60.198) 82.931,60.198 81.904,59.171 81.904,48.552 82.071,48.385 v1(82.071,48.344) ; 66.035,55.88 66.707,55.88 68.933,53.654 68.933,51.284 67.183,49.534 v1(67.183,49.022) ; v1(69.088,61.214) 69.088,62.484 69.85,63.246 75.438,63.246 76.2,64.008 v1(76.2,69.215) ; v1(93.453,49.53) 102.616,49.53 102.743,49.403 ; v1@102.235,56.134 102.743,55.626 102.743,49.403 ; U12.2@104.648,11.303 U12.3@104.648,13.843 102.743,15.748 v1(102.743,23.114) v1(102.743,40.513) 102.743,49.403
  other v1: 91.313,12.102
AP_CK32KO: R29.2 R30.2 U2.G20 | length 120.1
  Top w0.127: R29.2@26.356,34.899 27.465,34.899 R30.2@27.5,34.864 ; R30.2@27.51,34.874 28.285,34.874 v1(28.289,34.877)
  Bottom w0.127: v1(28.289,34.877) 29.766,34.877 30.099,34.544 30.099,24.504 31.531,23.072 34.36,23.072 34.798,22.635 34.798,18.923 35.433,18.288 37.084,18.288 38.009,19.213 55.579,19.213 57.532,17.259 73.549,17.259 74.482,18.192 74.482,27.09 73.517,28.054 73.517,57.395 73.528,57.406 73.528,58.196 71.96,59.765 62.94,59.765 62.734,59.559 60.465,59.559 59.653,58.746 v1(59.653,58.682)
AP_NMI: C102.2 R43.2 U2.G21 U4.16 | length 127.7
  Top w0.254: U4.16@26.141,50.759 26.168,50.732 26.43,50.732 26.476,50.686 26.712,50.686 27.498,49.9 27.498,48.244 27.902,47.84 30.921,47.84 v1(30.94,47.86) R43.2@30.96,47.879 ; v1(73.136,58.016) 74.699,58.016 75.057,57.658 75.057,57.107 C102.2@75.013,57.063
  Signal w0.254: v1(69.401,49.486) 69.401,53.526 73.136,57.261 v1(73.136,58.016)
  Bottom w0.254: v1(30.94,47.86) 28.937,47.86 28.194,47.117 28.194,44.704 28.575,44.323 35.845,44.323 37.941,42.228 37.941,23.315 39.653,21.603 67.625,21.603 69.401,23.379 v1(69.401,49.486) ; v1(60.303,58.682) 60.309,58.682 60.895,59.268 63.586,59.268 63.74,59.422 71.73,59.422 v1(73.136,58.016)
AP_RESET: C57.2 C103.2 R75.2 R88.2 U2.G22 U4.15 U32.2 | length 199.9
  Top w0.127: U4.15@26.141,50.359 26.628,50.359 27.118,49.869 27.118,47.71 27.934,46.894 28.409,46.894 C57.2@28.458,46.944 28.458,46.894 28.458,45.583 v1(28.702,45.339) ; v1(72.136,58.016) 72.136,58.039 72.898,58.801 73.431,58.801 C103.2@73.453,58.823 73.655,59.025 R75.2@75.395,59.025 ; v1(73.406,26.543) 73.406,25.908 74.63,24.684 89.977,24.684 90.658,25.365 90.658,32.492 91.059,32.893 101.219,32.893 101.727,32.385 101.727,30.786 R88.2@101.675,30.734
  Signal w0.127: v1(60.953,58.682) 61.042,58.682 61.186,58.826 65.253,58.826 65.659,58.42 65.659,47.752 66.167,47.244 68.326,47.244 68.945,47.863 v1(68.945,48.517)
  Bottom w0.127: v1(28.702,45.339) 29.118,44.923 35.754,44.923 38.322,42.355 38.322,23.473 39.797,21.997 67.608,21.997 68.945,23.334 v1(68.945,48.517) ; v1(60.953,58.682) 60.98,58.709 66.347,58.709 66.77,59.131 71.032,59.131 72.697,57.466 72.697,27.252 v1(73.406,26.543)
AP_WAKE_BT: R31.2 U2.L22 U6.6 | length 96.7
  Top w0.102: R31.2@22.469,16.231 22.606,16.368 v1(22.606,20.32) ; v1(31.369,19.685) 31.407,19.647 37.039,19.647 v1(37.078,19.608) ; U2.L22@60.953,56.082 61.001,56.082 61.159,56.24 61.807,56.24 61.835,56.267 61.982,56.267 62.055,56.34 69.181,56.34 v1(69.247,56.406)
  Bottom w0.102: v1(22.606,20.32) 23.241,19.685 v1(31.369,19.685) ; v1(37.078,19.608) 67.394,19.608 70.723,22.937 70.723,55.446 69.761,56.408 v1@69.249,56.408
BIAS_ITEST: R73.1 U2.D20 | length 9.8
  Bottom w0.127: v1(59.673,60.658) 59.722,60.658 60.141,60.24 61.765,60.24 61.971,60.446 61.99,60.464 62.87,60.464 64.516,62.11 64.516,62.738 R73.1@66.877,65.099
BIAS_REXT: R72.1 U2.D21 | length 6.4
  Bottom w0.127: v1(60.309,60.658) 60.303,60.664 60.303,61.319 60.534,61.55 61.261,61.55 63.845,64.135 64.412,64.135 R72.1@64.718,63.829
BIAS_VRAL: C101.1 U2.D19 | length 8.1
  Bottom w0.127: v1(59.056,60.617) 59.056,60.578 59.398,60.237 59.823,60.237 59.925,60.134 60.047,60.013 61.86,60.013 62.084,60.237 63.05,60.237 65.659,62.846 C101.1@65.679,62.846
BLDO1: C18.2 C72.2 C142.2 C152.2 C153.2 R74.2 U2.E19 U2.P18 U2.W22 U4.2 | length 264.8
  Top w0.152: U2.W22@60.953,50.882 60.978,50.858 60.978,50.68 61.092,50.566 61.734,50.566 61.803,50.497 64.054,50.497 v1(64.906,49.645)
  Top w0.254: 20.066,48.768 20.07,48.768 20.506,49.204 20.506,49.208
  Top w0.305: v1(16.107,47.331) 16.107,48.238 16.637,48.768 20.066,48.768 ; v1(58.406,59.516) 58.445,59.516 58.91,59.982 U2.E19@59.003,59.982 ; v1(58.543,54.014) 58.547,54.01 v1@58.547,53.975 ; C142.2@72.117,63.819 v1(72.136,63.837) 72.136,64.323 72.315,64.501 v1(91.947,64.501)
  Signal w0.305: v1(58.406,59.516) 59.109,59.516 59.537,59.944 64.77,59.944 68.663,63.837 v1(72.136,63.837)
  PWR w0.305: v1(59.913,52.442) 59.913,51.593 60.325,51.181 61.17,51.181 61.673,50.678 62.565,50.678 62.611,50.631 ; v1(62.446,66.557) 72.762,66.557 73.533,65.786 73.533,64.262 73.108,63.837 v1(72.136,63.837) ; v1(64.373,52.266) 64.373,52.258 63.297,51.181 63.297,50.919 63.009,50.631 62.611,50.631 ; v1(82.555,57.658) 78.486,57.658 77.978,57.15 77.978,46.736 76.454,45.212 64.135,45.212 62.611,46.736 62.611,50.631
  Bottom w0.305: v1(16.107,47.331) 10.073,47.331 9.398,48.006 9.398,62.738 11.049,64.389 23.948,64.389 24.837,65.278 24.837,74.979 26.509,76.651 90.1,76.651 91.948,74.803 v1(91.947,64.501) ; v1(58.543,54.014) 58.584,54.014 58.817,53.781 59.427,53.781 59.55,53.657 59.916,53.657 C152.2@60.657,52.917 ; R74.2@59.427,64.495 59.427,65.904 60.08,66.557 v1(62.446,66.557) ; v1(59.913,52.442) 59.942,52.472 60.211,52.472 C152.2@60.657,52.917 ; C153.2@60.774,53.978 60.778,53.974 60.778,52.921 C152.2@60.782,52.917 C152.2@60.657,52.917 ; v1(64.373,52.266) 64.332,52.266 64.124,52.058 63.512,52.058 63.021,52.549 C18.2@63.021,53.147 63.139,53.265 63.264,53.265 63.264,53.583 63.443,53.761 64.641,53.761 65.532,52.871 65.532,49.784 65.422,49.674 64.935,49.674 v1(64.906,49.645) ; v1(82.555,57.658) 82.555,58.679 83.185,59.309 91.313,59.309 91.948,59.944 v1(91.947,64.501)
BLDO2: C73.2 C143.2 C148.2 R49.1 U2.C19 U2.G11 U2.H11 U4.1 | length 229.7
  Top w0.305: U4.1@20.096,49.33 19.911,49.33 19.857,49.276 15.367,49.276 14.752,48.661 C73.2@14.752,47.315 13.914,47.315 13.462,46.863 13.462,43.434 13.841,43.055 14.708,43.055 v1(14.752,43.1) 14.799,43.053 15.367,43.053 16.002,42.418 16.002,36.322 17.272,35.052 23.443,35.052 23.961,35.571 23.961,36.179 25.555,37.772 26.627,37.772 35.521,46.666 35.521,53.209 35.292,53.438 35.292,54.438 35.439,54.585 35.496,54.585 35.814,54.903 C143.2@35.814,55.028 ; U2.H11@53.803,58.032 U2.G11@53.803,58.682 53.81,58.688 v1(53.81,58.776) ; v1(72.142,65.076) 72.142,65.538 72.467,65.863 90.882,65.863 92.639,67.62 v1(92.639,70.717)
  Signal w0.305: v1(53.81,58.776) 55.366,58.776 57.871,61.282 v1(59.003,61.282)
  PWR w0.305: v1(59.003,61.282) 58.689,61.595 58.689,64.472 59.314,65.096 v1@72.168,65.096
  Bottom w0.305: v1(14.752,43.1) 9.351,43.1 8.89,43.561 8.89,63.373 10.668,65.151 23.876,65.151 24.432,65.707 24.432,75.147 26.341,77.056 90.457,77.056 92.639,74.874 v1(92.639,70.717)
BLDO3: C74.2 R50.2 U4.4 | length 10.6
  Top w0.305: R50.2@17.375,43.116 17.375,43.129 17.257,43.247 16.943,43.247 16.764,43.425 16.764,46.897 16.943,47.075 17.281,47.075 17.399,47.193 C74.2@17.399,47.318 17.498,47.417 17.948,47.417 18.409,47.879 20.762,47.879 21.333,48.449 U4.4@21.333,49.551
BT_PCM_CLK: U2.K2 U6.26 | length 37.3
  Top w0.127: U6.26@24.391,32.178 24.391,32.628 25.639,33.876 25.639,35.218 25.639,35.484 26.25,36.095 26.516,36.095 27.322,36.095 37.319,46.091 37.319,49.531 41.833,54.046 41.833,54.516 42.172,54.855 42.609,54.855 v1(42.62,54.867)
  Bottom w0.127: v1(42.62,54.867) 42.643,54.867 43.034,55.258 43.245,55.258 43.362,55.375 45.636,55.375 46.748,56.487 46.757,56.487 47.044,56.774 47.57,56.774 47.601,56.743 47.858,56.743 v1(47.921,56.68)
BT_PCM_DIN: U2.L3 U6.27 | length 39.4
  Top w0.127: U6.27@23.476,32.178 23.476,32.628 25.412,34.564 25.412,35.312 25.412,35.578 26.156,36.322 26.422,36.322 27.228,36.322 37.092,46.185 37.092,49.625 40.902,53.435 40.902,53.691 41.606,54.396 41.606,54.844 v1(41.641,54.879)
  Bottom w0.127: v1(41.641,54.879) 41.689,54.927 42.124,54.927 42.696,55.499 43.165,55.499 43.268,55.602 45.542,55.602 46.654,56.714 46.663,56.714 47.078,57.13 48.11,57.13 48.345,56.894 48.345,56.47 48.573,56.242 v1(48.573,56.153)
BT_PCM_DOUT: U2.L4 U6.25 | length 38.4
  Top w0.127: U6.25@25.28,32.178 25.28,32.628 25.866,33.214 25.866,35.39 26.344,35.868 27.416,35.868 37.546,45.997 37.546,49.437 42.06,53.952 42.06,54.099 42.262,54.301 v1(42.262,54.39)
  Bottom w0.127: v1(42.262,54.39) 42.698,54.39 43.456,55.148 45.752,55.148 47.152,56.547 47.476,56.547 47.706,56.318 47.706,56.295 48.375,55.626 48.879,55.626 49.116,55.864 49.116,56.09 v1(49.179,56.153)
BT_PCM_SYNC: U2.K3 U6.28 | length 40.2
  Top w0.127: U6.28@22.587,32.178 22.587,32.628 23.788,33.828 23.95,33.828 25.185,35.064 25.185,35.406 25.185,35.672 26.061,36.549 26.328,36.549 27.134,36.549 36.865,46.279 36.865,49.719 40.447,53.301 40.447,54.238 41.487,55.279 41.913,55.279 v1(41.967,55.333)
  Bottom w0.127: v1(41.967,55.333) 42.39,55.756 43.101,55.756 43.174,55.829 45.448,55.829 46.56,56.941 46.569,56.941 46.984,57.357 48.374,57.357 48.674,57.057 48.674,56.75 v1(48.737,56.686)
BT_REG_ON: R23.2 R32.2 U2.L19 | length 114.4
  Top w0.102: v1(11.674,30.768) 11.674,31.979 R32.2@11.697,32.002 ; v1(33.997,22.445) 34.057,22.505 35.668,22.505 v1(36.693,21.48)
  Bottom w0.102: v1(11.674,30.768) 11.682,30.759 15.155,30.759 15.494,30.42 15.494,21.971 16.51,20.955 31.874,20.955 33.408,22.489 33.953,22.489 v1(33.997,22.445) ; v1(36.693,21.48) 36.959,21.213 36.985,21.213 37.192,21.006 67.742,21.006 70.049,23.313 70.049,54.257 67.952,56.354 65.882,56.354 65.848,56.388 64.927,56.388 64.781,56.241 61.321,56.241 60.581,55.501 59.584,55.501 v1(59.003,56.082)
BT_UART_CTS: R18.1 U2.H3 U6.44 | length 74.3
  Top w0.127: U6.44@16.698,21.793 14.046,21.793 13.46,21.207 R18.1@12.539,21.207 12.539,21.624 12.446,21.717 10.815,21.717 9.617,22.915 9.617,33.359 10.994,34.736 23.573,34.736 24.277,35.44 24.277,35.782 24.277,36.048 25.685,37.457 25.952,37.457 26.758,37.457 35.957,46.656 35.957,51.145 38.584,53.772 39.109,53.772 v1(39.444,53.437)
  Bottom w0.127: v1(39.444,53.437) 39.505,53.376 39.863,53.376 39.892,53.346 40.884,53.346 40.969,53.431 42.381,53.431 43.644,54.694 47.164,54.694 47.439,54.969 47.457,54.969 47.686,55.199 47.686,55.216 47.842,55.372 49.276,55.372 49.657,55.753 49.657,56.261 49.403,56.515 49.383,56.515 49.309,56.589 49.309,57.307 49.31,57.308 49.31,57.633 49.08,57.863 49.052,57.863 48.946,57.969 48.666,57.969 v1(48.603,58.032)
BT_UART_RTS: R21.1 U2.K1 U6.41 | length 64.2
  Top w0.127: U6.41@16.698,24.485 16.672,24.511 13.845,24.511 13.466,24.89 R21.1@12.539,24.89 12.573,24.924 12.573,25.4 12.192,25.781 10.863,25.781 10.298,26.347 10.298,33.077 11.276,34.055 23.856,34.055 24.958,35.158 24.958,35.5 24.958,35.766 25.967,36.776 26.234,36.776 27.04,36.776 36.638,46.373 36.638,49.813 40.055,53.23 v1(40.055,53.738) ; U2.K1@47.303,56.732 47.308,56.726 47.308,56.161 v1(47.314,56.155)
  Bottom w0.127: v1(40.055,53.738) 40.09,53.703 42.332,53.703 43.55,54.921 46.182,54.921 47.019,55.758 47.019,55.847 47.314,56.143 v1(47.314,56.155)
BT_UART_RX: R19.1 U2.H4 U6.43 | length 72.6
  Top w0.127: U6.43@16.698,22.682 13.919,22.682 13.46,22.223 R19.1@12.539,22.223 12.573,22.257 12.573,22.86 12.452,22.981 10.909,22.981 9.844,24.046 9.844,33.265 11.088,34.509 23.667,34.509 24.504,35.346 24.504,35.688 24.504,35.954 25.779,37.23 26.046,37.23 26.852,37.23 36.184,46.561 36.184,50.602 38.726,53.143 v1(38.726,53.226) ; U2.H4@49.253,58.032 49.253,58.074 v1(49.352,58.173)
  Bottom w0.127: v1(38.726,53.226) 38.77,53.182 39.145,53.182 39.181,53.145 39.282,53.045 40.756,53.045 40.83,53.119 40.978,53.119 41.063,53.204 42.476,53.204 43.738,54.467 47.258,54.467 47.533,54.742 47.563,54.742 47.939,55.118 49.343,55.118 49.911,55.686 49.911,56.328 49.564,56.676 49.564,57.872 49.352,58.083 v1(49.352,58.173)
BT_UART_TX: R20.1 U2.J6 U6.42 | length 69.6
  Top w0.127: U6.42@16.698,23.596 16.673,23.62 R20.1@12.539,23.62 12.573,23.654 12.573,24.13 12.446,24.257 10.874,24.257 10.071,25.06 10.071,33.171 11.182,34.282 23.762,34.282 24.731,35.252 24.731,35.594 24.731,35.86 25.873,37.003 26.14,37.003 26.946,37.003 36.411,46.467 36.411,50.202 38.962,52.753 v1(39.02,52.753) ; v1(50.546,56.896) 50.546,57.375 U2.J6@50.553,57.382
  Bottom w0.127: v1(39.02,52.753) 40.785,52.753 40.924,52.892 41.072,52.892 41.157,52.977 42.57,52.977 43.832,54.24 47.382,54.24 48.006,54.864 49.41,54.864 50.165,55.619 50.165,56.388 50.546,56.769 v1(50.546,56.896)
BT_WAKE_AP: U2.L21 U6.7 | length 91.2
  Top w0.102: v1(30.734,20.32) 30.791,20.32 31.032,20.079 v1(36.06,20.079)
  Bottom w0.102: v1(23.445,20.427) 23.499,20.373 30.681,20.373 v1(30.734,20.32) ; v1(36.06,20.079) 67.417,20.079 70.452,23.115 70.452,54.424 68.119,56.757 66.049,56.757 66.015,56.791 64.76,56.791 64.614,56.645 61.154,56.645 61.096,56.586 60.716,56.586 v1(60.265,56.135)
CLDO2: C79.2 C80.2 R51.2 U4.17 U4.20 | length 17.2
  Top w0.254: U4.20@26.141,52.359 27.467,52.359 27.559,52.451 ; U4.17@26.346,51.159 26.504,51.159 26.61,51.052 27.053,51.052 27.813,50.292 ; v1(28.883,52.443) 28.956,52.37 28.956,51.838 29.105,51.689 32.004,51.689 32.131,51.562 32.828,51.562 R51.2@32.841,51.575
  Top w0.508: 27.559,52.451 28.875,52.451 v1(28.883,52.443) ; 27.813,50.292 27.998,50.107 27.998,50.09 28.862,49.225 v1(28.862,49.175)
  PWR w0.305: v1(28.862,49.175) 28.889,49.149 30.353,49.149 30.607,49.403 30.607,52.07 30.234,52.443 v1(28.883,52.443)
CPUX_URX: Q4.2 R85.1 U2.D12 | length 94.7
  Top w0.102: v1(52.505,72.435) 52.505,72.339 52.696,72.148 52.696,64.089 53.87,62.915 53.87,62.433 54.005,62.298 54.005,61.08 U2.D12@54.453,60.632 ; v1(78.964,41.227) 78.964,42.171 79.348,42.555 99.572,42.555 99.893,42.234 R85.1@99.893,40.47 99.893,40.076 99.568,39.751 99.568,39.034 Q4.2@99.376,38.842
  Bottom w0.102: v1(52.505,72.435) 52.785,72.714 76.003,72.714 78.138,70.579 78.138,42.065 78.964,41.239 v1(78.964,41.227)
CPUX_UTX: R84.1 U2.C9 | length 98.9
  Top w0.102: v1(50.798,72.853) 50.744,72.798 50.744,70.414 51.692,69.466 51.692,63.953 52.197,63.448 52.197,61.827 52.469,61.555 52.469,61.316 U2.C9@52.503,61.282 ; v1(79.704,41.97) 80.005,42.271 96.323,42.271 96.901,41.693 96.901,34.61 97.499,34.013 100.203,34.013 R84.1@100.226,34.036
  Bottom w0.102: v1(50.798,72.853) 50.861,72.916 76.182,72.916 78.38,70.718 78.38,42.397 78.807,41.97 v1(79.704,41.97)
DCXO_LDOOUT: C127.2 U2.D22 | length 3.5
  Bottom w0.127: v1(60.96,60.667) 61.719,61.427 61.719,61.661 62.416,62.357 63.188,62.357 C127.2@63.528,62.016
DCXO_XIN: C128.2 U2.B23 X2.1 | length 5.3
  Top w0.127: U2.B23@61.603,61.932 61.632,61.961 62.017,61.961 63.539,63.484 63.539,63.747 63.622,63.83 63.801,63.83 64.008,64.036 C128.2@64.008,64.045 ; C128.2@63.959,64.045 63.959,64.233 64.165,64.026 X2.1@65.567,64.026
DCXO_XOUT: R80.2 U2.B22 | length 7.7
  Top w0.127: U2.B22@60.953,61.932 61.3,62.279 61.862,62.279 62.061,62.478 62.212,62.478 63.312,63.578 63.312,66.995 63.743,67.426 64.346,67.426 R80.2@64.377,67.395
DDC_CEC_EN: R12.1 U2.E11 | length 28.7
  Top w0.127: v1(70.391,70.924) 70.778,71.311 76.844,71.311 R12.1@76.846,71.312
  Bottom w0.127: v1(53.805,59.866) 55.134,59.866 55.553,60.285 56.421,60.285 56.521,60.184 57.473,60.184 58.054,60.766 58.054,60.772 58.164,60.882 58.164,61.477 58.691,62.004 61.031,62.004 68.749,69.723 69.977,69.723 70.409,70.155 70.409,70.906 v1(70.391,70.924)
EMMC_CLK: C43.2 R34.1 U3.M6 | length 29.8
  Top w0.127: R34.1@64.933,55.85 65.002,55.85 v1(65.154,55.698) ; R34.1@65.216,55.647 66.214,55.647 66.56,55.993 86.215,55.993 86.708,55.5 v1(86.708,55.469)
  Bottom w0.127: v1(86.708,55.469) 86.708,55.418 87.495,54.631 90.796,54.631 91.871,53.557 93.164,53.557 v1(93.45,53.271)
EMMC_CMD: R37.1 U2.M21 U3.M5 | length 43.3
  Top w0.127: U2.M21@60.303,55.432 60.332,55.403 60.553,55.403 60.87,55.085 62.011,55.085 62.069,55.028 68.949,55.028 69.215,55.294 v1(85.474,55.294) ; v1@93.091,52.832 93.134,52.789 93.432,52.789 U3.M5@93.45,52.771
  Bottom w0.127: v1(85.474,55.294) 86.328,55.294 87.259,54.363 90.574,54.363 91.775,53.163 92.913,53.163 93.001,53.074 93.001,52.89 93.074,52.818 93.074,50.449 93.357,50.165 97.663,50.165 v1(98.806,51.308)
  other v1: 93.065,52.827
EMMC_D0: U2.N22 U3.A3 | length 28.5
  Top w0.127: U2.N22@60.953,54.782 61.467,54.268 76.454,54.268 82.55,54.268 85.525,54.268 85.944,53.849 85.944,53.467 87.64,51.771 U3.A3@87.95,51.771
EMMC_D1: U2.N23 U3.A4 | length 31
  Top w0.127: U2.N23@61.603,54.782 61.775,54.61 69.723,54.61 69.787,54.61 ccw(c69.787,54.762) 69.939,54.762 69.939,54.915 cw(c70.091,54.915) 70.244,54.915 70.244,54.648 ccw(c70.396,54.648) 70.549,54.648 70.549,54.915 cw(c70.701,54.915) 70.853,54.915 70.853,54.648 ccw(c71.006,54.648) 71.158,54.648 71.158,54.915 cw(c71.311,54.915) 71.463,54.915 71.463,54.648 ccw(c71.615,54.648) 71.768,54.648 71.768,54.915 cw(c71.92,54.915) 72.073,54.915 72.073,54.762 ccw(c72.225,54.762) 72.225,54.61 72.644,54.61 85.852,54.61 86.417,54.045 86.417,53.522 87.668,52.271 U3.A4@87.95,52.271
EMMC_D2: U2.R22 U3.A5 | length 28.2
  Top w0.127: U2.R22@60.953,53.482 61.339,53.868 63.373,53.868 69.596,53.868 85.16,53.868 v1(85.168,53.876) ; v1(86.813,54.202) 86.813,53.712 87.755,52.771 U3.A5@87.95,52.771
  Bottom w0.127: v1(85.168,53.876) 85.2,53.876 85.525,54.202 v1(86.813,54.202)
EMMC_D3: U2.R23 U3.B2 | length 27.8
  Top w0.127: U2.R23@61.603,53.482 85.32,53.482 87.411,51.392 v1@87.411,51.367
  Bottom w0.127: v1(87.373,51.345) 87.393,51.325 88.442,51.325 v1(88.462,51.305)
EMMC_D4: U2.T22 U3.B3 U3.C3 | length 30.2
  Top w0.127: U2.T22@60.953,52.832 61.677,52.832 61.799,52.954 62.565,52.954 62.588,52.931 64.925,52.931 65.422,52.434 82.169,52.434 84.69,52.434 v1(86.303,50.821) ; U3.B3@88.45,51.771 v1(88.95,51.771)
  Bottom w0.127: v1(86.303,50.821) 86.303,51.378 86.741,51.816 88.904,51.816 v1(88.95,51.771)